# Altium PCB f2.PcbDoc (part 2 of 2)
Units mil, origin at the board's own origin, x right, y up, seen from the top; angles counter-clockwise.
Board outline 2023.27 x 874.02 mil, 6 copper layers (Top Layer, layer2, flex_top, flex_bottom, layer5, Bottom Layer), stack 57.4 mil thick; 105 components, 82 nets, 465 pads, 108 vias.
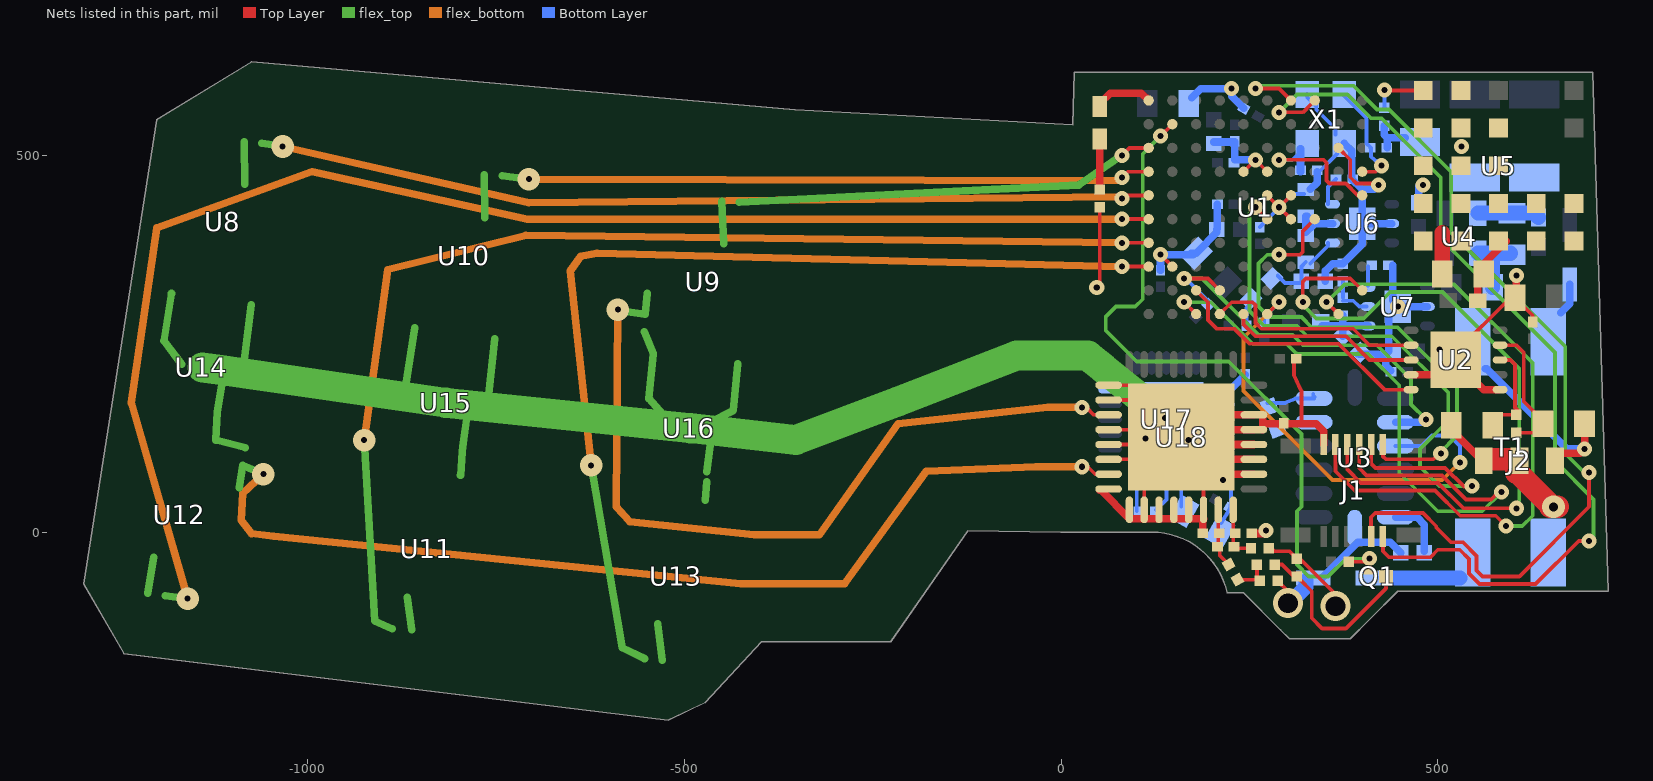
[diagram p6: the nets of this part, all layers, seen from the top]

## Via types
v1: diameter 20, hole 8, Top Layer to Bottom Layer, tented both sides, 79 vias
v2: diameter 30, hole 8, Top Layer to Bottom Layer, tented both sides, 21 vias
v3: diameter 20, hole 8, Top Layer to Bottom Layer, 3 vias
v4: diameter 40, hole 26, Top Layer to Bottom Layer, 2 vias
v5: diameter 30, hole 12, Top Layer to Bottom Layer, tented both sides, 1 vias
v6: diameter 20, hole 8, Top Layer to Bottom Layer, tented bottom, 1 vias
v7: diameter 24, hole 8, Top Layer to Bottom Layer, tented both sides, 1 vias

## Nets (pads, with @x,y where several pads share a name; then routed paths per layer and width w, separated by ;. In a path a pad name is that pad's centre, name@x,y a point inside that pad or via, vN(x,y) a via of type N, cw(c..) or ccw(c..) an arc to the next point about the centre after c; other vN are vias at no path point) (continued)
GND: C1.1 C2.1 C3.1 C4.1 C5.2 C6.1 C8.1 C10.1 C11.1 C14.1 C15.1 C16.1 C17.1 C18.2 C20.1 C21.1 C22.1 C23.1 C24.1 C25.1 C26.1 C27.1 C28.1 C29.1 C30.1 C31.1 C32.1 C33.1 C34.1 C35.1 C37.1 C38.1 C39.1 C40.1 C41.1 C42.1 C43.1 C44.1 C45.1 D3.1 J1.11 R1.1 R6.1 R7.2 R9.1 R10.2 R11.2 R12.2 R14.2 R16.2 R18.2 R21.1 R24.1 R25.1 U1.B3 U1.D5 U1.D6 U1.E4 U1.E5 U1.F4 U1.J8 U2.4 U2.6 U2.11 U3.7 U4.4 U5.C2 U5.D1 U5.D2 U5.D3 U5.D4 U5.D5 U5.E2 U5.E3 U5.E4 U5.E5 U6.2 U6.7 U7.2 U7.7 U14.4 U14.9 U15.4 U15.9 U16.4 U16.9 U17.4 U17.5 U17.10 U17.16 U17.17 U17.21 U18.1 U18.2 U18.4 U18.5 U18.6 U18.8 U18.9 U18.10 U18.11 U18.12 U18.13 U18.14 U18.18 U18.19 U18.20 U18.21 U18.22 U18.33 X1.2 X1.4 | length 5519.3
  Top Layer w5: v1@47.24,326.77 51.18,330.71 R1.1@51.18,431.1 ; U18.6@62.99,96.46 U18.33@98.43,96.46 ; U18.5@62.99,116.14 U18.33@104.33,116.14 ; U18.4@62.99,135.83 U18.33@102.36,135.83 ; U18.2@62.99,175.2 U18.33@102.36,175.2 ; U18.1@62.99,194.88 90.55,194.88 U18.33@94.49,190.94 ; U18.10@110.24,29.53 U18.33@110.24,68.9 ; v1(131.89,368.11) U1.J8@147.64,352.36 ; U18.14@188.98,17.72 U18.14@188.98,21.65 ; U18.14@188.98,29.53 U18.33@188.98,70.87 ; U1.F4@242.13,478.35 v1(257.87,494.09) U1.E4@273.62,478.35 ; U18.22@255.91,155.51 U18.22@267.72,155.51 ; U1.E5@273.62,446.85 v1(289.37,431.1) ; R21.1@287.4,-64.96 301.18,-78.74 v4@301.18,-96.46 ; U1.D6@305.12,415.35 v1(289.37,431.1) ; U1.D5@305.12,446.85 v1(289.37,431.1) ; C33.1@312.2,230.31 312.2,229.53 309.06,226.38 309.06,208.66 318.9,187.01 318.9,143.7 ; U1.B3@368.11,509.84 383.86,494.09 383.86,470.84 392.1,462.6 v1@419.29,462.6 ; U2.11@523.62,228.35 523.62,238.19 596.46,311.02 C45.1@598.43,311.02 ; C45.1@602.36,311.02 625.98,287.4 C5.2@625.98,278.74
  Top Layer w10: U18.8@51.18,55.12 53.15,55.12 90.55,17.72 U18.14@188.98,17.72 ; C35.1@187.8,-1.97 U18.14@187.8,16.93 ; U18.33@216.54,116.14 U18.20@255.91,116.14 ; U18.33@218.5,135.83 U18.21@255.91,135.83 ; U18.33@218.5,155.51 U18.22@255.91,155.51 ; U18.33@220.47,96.46 U18.19@255.91,96.46 ; U18.33@222.44,76.77 U18.18@255.91,76.77 ; C34.1@253.15,-1.97 267.72,-1.97 v1(271.65,1.97) ; U18.21@267.72,135.83 U18.22@267.72,155.51 ; 267.72,143.7 338.58,143.7 348.43,133.86 J1.11@348.43,116.14 ; U2.4@464.57,208.66 U2.11@511.81,208.66 ; U2.11@549.21,200.79 561.02,188.98 U2.6@580.71,188.98 ; C45.1@604.33,316.93 v1(604.33,340.55)
  Top Layer w20: C15.1@505.91,342.52 505.91,397.64
  flex_top w10: C26.1@-1180.99,316.6 -1190.94,253.94 U14.9@-1167.32,222.44 ; R16.2@-1122.16,122.37 -1120.08,159.45 -1120.02,159.79 U14.9@-1112.2,206.69 ; R16.2@-1122.05,122.05 R24.1@-1083,112.09 ; U14.9@-1115.28,214.94 -1084.65,228.35 R10.2@-1074.92,301.51 ; C27.1@-858.18,271.12 -870.08,194.88 U15.9@-842.52,177.17 ; R14.2@-797.33,75.33 -795.28,106.3 U15.4@-794.34,112.95 U15.9@-787.4,163.39 ; U15.9@-796,169.29 -790.46,171.41 -759.84,183.07 R12.2@-752.06,256.43 ; R25.1@-553.15,265.75 -541.34,236.22 -541.41,235.5 -547.24,177.17 U16.9@-519.68,145.67 ; R18.2@-472.51,42.07 U16.4@-470.47,66.93 ; U16.4@-470.49,79.89 U16.9@-464.57,125.98 ; U16.9@-466.54,145.67 -435.04,161.42 R11.2@-429.2,223.17
  flex_top w40: U14.9@-1139.76,218.5 -1115.28,214.94 -816.89,171.54 -814.96,171.26 -796,169.29 -494.07,138 -492.13,137.8 -352.36,122.05 -216.54,173.23 -59.05,234.25 35.43,234.25 57.09,216.54 v3(137.8,151.57)
  Bottom Layer w5: U17.10@64.96,188.98 U17.21@100.39,188.98 ; C30.1@100.39,27.56 U17.5@100.39,74.8 U17.21@100.39,116.14 ; U17.4@120.08,74.8 U17.21@120.08,116.14 ; v1@210.63,74.8 225.59,59.84 225.59,43.31 224.41,31.5 C29.1@212.6,11.81 ; C2.1@263.78,404.72 v1@289.37,430.32 ; v1(289.37,431.1) 307.09,448.82 R6.1@322.83,448.82 ; X1.4@326.77,580.71 326.77,576.77 338.58,564.96 338.58,561.02 364.17,535.43 X1.2@364.17,527.56 ; C11.1@339.76,478.35 342.52,478.35 X1.2@366.14,501.97 ; C25.1@392.35,234.25 C25.1@396.96,238.86
  Bottom Layer w10: C41.1@131.89,347.64 v1(131.89,368.11) C32.1@175.2,368.11 ; C32.1@173.03,369.88 C32.1@179.33,369.88 ; U17.21@173.23,169.29 U17.17@214.57,169.29 ; U17.21@173.23,188.98 U17.16@214.57,188.98 ; C43.1@173.23,576.77 185.04,588.58 v1(226.38,588.58) 226.38,578.64 C40.1@242.42,562.6 ; C32.1@181.1,372.05 206.69,397.64 C4.1@206.69,401.57 ; C3.1@202.76,517.72 230.32,517.72 230.32,494.09 v1(257.87,494.09) ; C4.1@207.48,402.36 C39.1@207.48,435.04 ; U17.17@224.41,169.29 224.41,188.98 C31.1@244.09,208.66 ; R6.1@330.71,454.72 339.76,463.78 C11.1@339.76,478.35 ; D3.1@346.46,-61.02 393.7,-13.78 437.01,-13.78 C6.1@450.79,-27.56 ; C22.1@350.39,332.68 350.39,346.46 360.24,356.3 R9.1@374.02,356.3 399.61,381.89 U6.7@399.61,405.51 ; X1.2@375.98,515.75 385.83,505.91 385.83,468.5 399.61,454.72 ; C25.1@395.67,236.22 431.1,236.22 435.04,240.16 U7.7@435.04,283.46 ; U6.7@399.61,409.45 399.61,454.72 ; U6.7@409.45,409.45 U6.2@438.98,409.45 ; v1(421.26,460.63) 415.35,454.72 399.61,454.72 ; R7.2@429.13,539.37 429.13,527.56 433.07,523.62 ; C23.1@431.1,234.25 431.1,220.47 C8.1@437.8,213.78 ; C10.1@433.07,509.84 433.07,523.62 ; U7.7@440.16,307.87 C24.1@440.16,354.33 ; U7.7@448.82,299.21 U7.2@486.22,299.21 ; C18.2@456.69,523.62 433.07,523.62 ; C20.1@474.41,437.01 v1@474.41,458.66
  Bottom Layer w20: v4@301.18,-96.46 324.8,-72.83 D3.1@324.8,-64.96 ; U4.4@553.15,370.08 C14.1@596.46,370.08 ; C44.1@572.83,324.8 572.83,360.24
  other v1: 214.57,68.9 446.85,299.21 47.24,324.8 480.32,460.63 531.5,511.81
  other v3: 169.29,122.05 112.2,124.02
  other v4: 301.18,-94.49
  other v6: 501.97,242.13
I2C_SCL: R3.1 U1.G9 U3.2 | length 557.5
  Top Layer w5: v1(163.39,336.61) 194.88,336.61 U1.G9@210.63,320.87
  flex_top w5: v1(163.39,336.61) 187.01,336.61 261.81,261.81 307.09,261.81 320.87,248.03 419.29,248.03 464.57,202.76 464.57,169.29 v1(484.25,149.61)
  Bottom Layer w5: v1@165.35,336.61 194.88,307.09 194.88,302.14 R3.1@195.36,301.66
  Bottom Layer w10: U3.2@443.9,145.67 v1@482.28,145.67
I2C_SDA: R2.1 U1.E10 U3.3 | length 660.5
  Top Layer w5: U1.E10@273.62,289.37 v1(289.37,305.12)
  flex_bottom w5: v1(289.37,305.12) 242.13,257.87 242.13,187.01 360.24,68.9 505.91,68.9 v1(529.53,92.52)
  Bottom Layer w5: R2.1@269.69,277.56 269.69,285.43 v1(289.37,305.12) ; U3.3@443.9,114.17 478.35,114.17 492.13,127.95 515.75,127.95 529.53,114.17 v1(529.53,92.52)
INPUT_NEG: C13.1 J2.3 T1.1 | length 249.2
  Top Layer w10: J2.3@655.51,104.33 688.98,104.33 v1(694.88,110.24) C13.1@694.88,141.73
  Bottom Layer w10: T1.1@562.99,216.54 564.96,216.54 671.26,110.24 v1(694.88,110.24)
INPUT_POS: C12.1 J2.1 J2.2 T1.3 | length 202.7
  Top Layer w10: C12.1@523.62,141.73 523.62,129.92 559.06,94.49 J2.1@561.02,94.49 J2.1@566.93,94.49 ; J2.2@604.33,94.49 J2.2@608.27,94.49
  Top Layer w30: J2.1@566.93,96.46 604.33,96.46 604.33,94.49 J2.2@604.33,78.74 ; J2.2@606.3,78.74 v5@651.57,33.46 ; v5@649.61,33.46 v5@659.45,33.46
  other v5: 653.54,33.46
LED_0: R26.1 U1.K5 | length 1184.1
  Top Layer w5: v1@84.65,446.85 U1.K5@116.14,446.85
  flex_top w10: R26.1@-1061.14,516.07 v2(-1033.46,511.81)
  flex_bottom w10: v2(-1033.46,511.81) -706.69,437.01 v1@80.69,444.88 ; v1(80.71,442.91) v1@80.71,444.88
LED_1: R27.1 U1.K3 | length 560.3
  Top Layer w5: v1(80.71,500) 90.55,509.84 U1.K3@116.14,509.84
  flex_top w10: R27.1@-427.23,437.74 23.62,460.63 v1(80.71,500)
LED_2: R28.1 U1.K4 | length 865.8
  Top Layer w5: v1(80.71,470.47) 88.58,478.35 U1.K4@116.14,478.35
  flex_top w10: R28.1@-742.21,472.97 v2(-706.69,468.5)
  flex_bottom w10: v2(-706.69,468.5) v1@80.7,466.54 ; v1@80.71,466.54 v1(80.71,470.47)
LED_3: R13.1 U1.K7 | length 1510.4
  Top Layer w5: v1(80.71,383.86) U1.K7@116.14,383.86
  flex_top w10: v2(-925.2,122.05) -911.42,-118.11 R13.1@-887.71,-128.48
  flex_bottom w10: v2(-925.2,122.05) -893.7,348.43 -710.63,393.7 v1(80.71,383.86)
LED_4: R15.1 U1.K6 | length 1871.9
  Top Layer w5: v1(80.71,415.35) U1.K6@116.14,415.35
  flex_top w10: R15.1@-1189.09,-84.32 v2(-1159.45,-88.58)
  flex_bottom w10: v2(-1159.45,-88.58) -1234.25,171.26 -1200.79,403.54 -994.09,478.35 -708.66,415.35 v1(80.71,415.35)
LED_5: R17.1 U1.K8 | length 1316.5
  Top Layer w5: v1(80.71,352.36) U1.K8@116.14,352.36
  flex_top w10: v2(-624.02,88.58) -582.68,-153.54 R17.1@-553.08,-168.06
  flex_bottom w10: v2(-624.02,88.58) -651.57,346.46 -637.8,366.14 -616.14,370.08 v1(80.71,352.36)
NetC6_2: C6.2 U3.6 | length 77.9
  Bottom Layer w10: U3.6@443.9,19.69 472.44,19.69 482.28,9.84 C6.2@482.28,-25.59
NetC7_1: C7.1 U3.12 | length 44.3
  Bottom Layer w5: C7.1@291.34,145.67 U3.12@335.63,145.67
NetC7_2: C7.2 U3.13 | length 68
  Bottom Layer w5: C7.2@273.62,171.26 297.24,171.26 311.02,177.17 U3.13@335.63,177.17 ; U3.13@334.65,183.07 334.65,181.1 U3.13@336.61,179.13
NetC14_2: C14.2 L4.1 U4.3 | length 83.2
  Bottom Layer w20: U4.3@553.15,423.23 C14.2@598.43,423.23 627.95,423.23 L4.1@633.86,417.32
NetC15_2: C15.2 L3.1 U5.A4 U5.A5 U5.B4 U5.B5 U5.C3 U5.C4 U5.C5 | length 94.2
  Top Layer w10: L3.1@553.15,307.09 553.15,348.43 U5.C5@590.55,385.83
NetC21_2: C21.2 U6.6 | length 37.9
  Bottom Layer w5: U6.6@354.33,435.04 354.33,457.87 C21.2@364.96,468.5
NetC22_2: C22.2 L1.1 R5.2 U6.4 | length 102.9
  Bottom Layer w5: L1.1@287.4,340.55 297.24,330.71 318.9,330.71 318.9,352.36 R5.2@324.8,358.27 ; R5.2@330.71,356.3 354.33,379.92 U6.4@354.33,383.86
NetC24_2: C24.2 U7.6 | length 25.6
  Bottom Layer w5: U7.6@407.48,326.77 C24.2@407.48,352.36
NetC25_2: C25.2 L2.1 R8.2 U7.4 | length 88.6
  Bottom Layer w10: L2.1@346.46,273.62 C25.2@374.02,273.62 ; C25.2@374.02,259.84 C25.2@374.02,273.62 ; R8.2@374.02,287.4 C25.2@374.02,273.62 ; U7.4@407.48,273.62 C25.2@374.02,273.62
NetC29_2: C29.2 U17.2 | length 41.3
  Bottom Layer w5: C29.2@159.45,33.46 U17.2@159.45,74.8
NetC30_2: C30.2 U17.3 | length 51
  Bottom Layer w5: C30.2@125.98,29.53 139.76,43.31 U17.3@139.76,74.8
NetD1_2: D1.2 R1.2 | length 66.9
  Top Layer w10: R1.2@51.18,454.72 D1.2@51.18,521.65
NetD2_1: D2.1 T1.4 | length 42.3
  Bottom Layer w10: T1.4@663.39,291.34 675.2,303.15 D2.1@675.2,328.74
NetD3_2: D3.2 T1.2 | length 98.4
  Bottom Layer w20: D3.2@431.1,-61.02 T1.2@529.53,-61.02
NetL1_2: L1.2 R29.1 | length 34.8
  Bottom Layer w5: R29.1@246.06,273.62 246.06,297.24 L1.2@253.94,305.12
NetQ1_D: Q1.D R19.2 R20.2 | length 233.7
  Top Layer w5: R20.2@285.43,-43.31 293.31,-43.31 309.06,-59.06 R19.2@311.02,-59.06 ; R19.2@311.02,-55.12 R19.2@316.93,-55.12 ; R19.2@316.93,-62.99 332.68,-78.74 332.68,-114.17 346.46,-127.95 377.95,-127.95 431.1,-74.8 ; 431.1,-72.83 Q1.D@431.1,-61.02
NetR5_1: R5.1 R6.2 U6.5 | length 77.9
  Bottom Layer w10: R6.2@326.77,419.29 R6.2@325.79,418.31 ; 334.65,407.48 324.8,397.64 R6.2@324.8,417.32 ; U6.5@360.24,409.45 334.65,409.45 R6.2@325.79,418.31 ; R6.2@324.8,417.32 R6.2@324.8,419.29 R6.2@325.79,418.31 ; R6.2@324.8,417.32 R6.2@325.79,418.31
NetR7_1: R7.1 U5.E1 | length 75.4
  Top Layer w5: v1(429.13,586.61) 429.53,586.22 U5.E1@480.71,586.22
  Bottom Layer w5: R7.1@429.13,562.99 v1(429.13,586.61)
NetR8_1: R8.1 R9.2 U7.5 | length 56.4
  Bottom Layer w5: R8.1@374.02,307.09 387.8,307.09 395.67,299.21 U7.5@405.51,299.21 ; R8.1@374.02,311.02 R9.2@374.02,332.68
NetR13_2: R13.2 U11.K | length 43.7
  flex_top w10: U11.K@-868.11,-86.61 R13.2@-862.2,-129.92
NetR15_2: R15.2 U12.K | length 48.2
  flex_top w10: R15.2@-1212.48,-81.03 U12.K@-1204.72,-33.46
NetR17_2: R17.2 U13.K | length 48.8
  flex_top w10: U13.K@-535.43,-122.05 R17.2@-529.59,-170.53
NetR20_1: R20.1 R21.2 R33.1 | length 48.8
  Top Layer w5: R33.1@234.25,-63.38 R21.2@263.39,-63.38 ; R21.2@259.84,-62.99 R20.1@259.84,-43.31
NetR26_2: R26.2 U8.K | length 56.3
  flex_top w10: R26.2@-1084.65,517.72 U8.K@-1084.05,461.44
NetR27_2: R27.2 U9.K | length 56.4
  flex_top w10: R27.2@-450.79,438.98 U9.K@-447.79,382.69
NetR28_2: R28.2 U10.K | length 57.3
  flex_top w10: R28.2@-765.75,474.41 U10.K@-764.93,417.16
NRST: J1.3 U1.E6 | length 848.1
  Top Layer w5: v1(257.87,431.1) U1.E6@273.62,415.35 ; J1.3@411.42,116.14 411.42,91.02 417.32,85.12 509.73,85.12 534.63,60.22 v1@550.38,60.22
  flex_top w5: v1(257.87,431.1) 250,423.23 250,293.31 269.69,273.62 312.99,273.62 326.77,259.84 438.98,259.84 513.78,185.04 513.78,147.64 476.38,110.24 476.38,86.61 501.97,61.02 v1@551.18,61.02
  other v1: 545.28,61.02
RS485_A: C12.2 R4.1 U2.8 | length 116.3
  Top Layer w5: C12.2@576.77,155.51 606.3,155.51 606.3,161.42 602.36,165.35 602.36,222.44 596.46,228.35 U2.8@586.61,228.35
RS485_B: C13.2 R4.2 U2.9 | length 166.3
  Top Layer w5: U2.9@586.61,248.03 604.33,248.03 614.17,238.19 614.17,173.23 639.76,147.64 C13.2@639.76,143.7 ; R4.2@606.3,131.89 C13.2@635.83,131.89
RS485_DE: U1.F10 U2.3 | length 247.9
  Top Layer w5: U1.F10@242.13,287.4 242.13,275.59 257.87,259.84 377.95,259.84 409.45,228.35 U2.3@458.66,228.35
RS485_DI: U1.H9 U2.5 | length 347.9
  Top Layer w5: U1.H9@179.13,320.87 194.88,305.12 194.88,281.5 206.69,269.69 230.32,269.69 250,250 ; 250,249.84 368.27,249.84 429.13,188.98 U2.5@458.66,188.98
RS485_RO: U1.G10 U2.2 | length 292
  Top Layer w5: U1.G10@210.63,289.37 226.38,305.12 253.94,305.12 257.87,301.18 257.87,277.56 265.59,269.84 387.64,269.84 409.45,248.03 U2.2@458.66,248.03
STATUS_LED: D1.1 U1.K1 | length 78.7
  Top Layer w10: D1.1@51.18,564.96 51.18,568.9 64.96,582.68 106.3,582.68 U1.K1@116.14,572.83
STRAIN_BRIDGE_LEAD: R19.1 R32.2 | length 113.9
  Top Layer w5: R32.2@275.59,-21.65 279.53,-21.65 283.46,-25.59 303.15,-25.59 R19.1@311.02,-33.46 ; R19.1@312.99,-35.43 316.93,-35.43 v4@366.14,-84.65
  other v4: 364.17,-98.43
STRAIN_BRIDGE_NEG: C19.2 C35.2 R33.2 U18.15 | length 77.3
  Top Layer w5: C19.2@208.66,-19.69 U18.15@208.66,29.53 ; C19.2@210.63,-19.69 210.63,-31.11 R33.2@222.44,-42.92
STRAIN_BRIDGE_POS: C19.1 C34.2 R32.1 U18.16 | length 61.8
  Top Layer w5: U18.16@228.35,17.72 228.35,-19.69 230.32,-21.65 R32.1@251.97,-21.65
STRAIN_BRIDGE_POWER: Q1.G R31.1 U1.J2 | length 974
  Top Layer w5: v1(131.89,525.59) U1.J2@147.64,541.34 ; R31.1@381.89,-39.37 v1@409.45,-39.37 ; Q1.G@409.45,-51.18 v1@409.45,-39.37 ; v1(409.45,-35.43) v1@409.45,-39.37
  flex_top w5: v1(131.89,525.59) 108.27,501.97 108.27,309.06 98.43,299.21 72.83,299.21 59.06,285.43 59.06,267.72 100.39,226.38 222.44,226.38 318.9,129.92 318.9,33.46 312.99,27.56 312.99,-43.31 328.74,-59.06 354.33,-59.06 377.95,-35.43 v1(409.45,-35.43)
TCLK: J1.1 U1.C6 | length 674.1
  Top Layer w5: v1(289.37,368.11) 316.93,368.11 320.87,372.05 320.87,399.61 U1.C6@336.61,415.35 ; J1.1@427.17,116.14 427.17,100.39 431.1,96.46 494.09,96.46 v1@501.97,104.33
  flex_top w5: v1(289.37,368.11) 273.62,368.11 261.81,356.3 261.81,299.21 275.59,285.43 318.9,285.43 332.68,271.65 446.85,271.65 525.59,192.91 525.59,127.95 v1@501.97,104.33
  other v1: 503.94,104.33
TDI: J1.5 U1.H10 | length 874.7
  Top Layer w5: v1(163.39,305.12) U1.H10@179.13,289.37 ; J1.5@395.67,116.14 395.67,84.96 405.51,75.12 505.59,75.12 537.4,43.31 570.87,43.31 v1@580.71,53.15
  flex_top w5: v1(163.39,305.12) 198.82,305.12 253.94,250 299.21,250 309.21,240 312.99,236.22 407.48,236.22 448.82,194.88 448.82,78.74 500,27.56 559.06,27.56 v1(584.65,53.15)
TDO: J1.9 U1.B10 | length 885.2
  Top Layer w5: v1(352.13,305.12) 352.36,305.12 U1.B10@368.11,289.37 ; J1.9@364.17,116.14 364.17,80.71 389.76,55.12 496.22,55.12 529.84,21.5 576.93,21.5 v1(590.55,7.87)
  flex_top w5: v1(352.13,305.12) v1@352.13,305.35 ; v1@352.36,305.12 375.98,328.74 521.65,328.74 625.98,224.41 625.98,21.65 612.2,7.87 v1(590.55,7.87)
TEMP_0: R23.2 R25.2 U18.3 | length 1063
  Top Layer w5: v1(27.56,165.35) 33.46,165.35 43.31,155.51 U18.3@62.99,155.51
  flex_top w10: v2@-580.71,293.31 R25.2@-552.53,289.31 ; R25.2@-551.91,289.31 -550.57,303.09 R23.2@-549.21,316.93
  flex_bottom w10: v2(-588.58,295.28) -590.55,33.46 -572.83,13.78 -407.48,-3.94 -320.87,-3.94 -216.54,143.7 -17.72,165.35 v1(27.56,165.35)
TEMP_1: R22.2 R24.2 U18.7 | length 1377.3
  Top Layer w5: v1(27.56,86.61) 35.43,86.61 45.28,76.77 U18.7@62.99,76.77
  flex_top w10: R22.2@-1090.88,58.94 -1086.61,88.58 -1086.38,88.48 v2(-1059.05,76.77)
  flex_bottom w10: v2(-1059.05,76.77) -1086.61,51.18 -1088.58,15.75 -1074.8,-1.97 -1045.28,-5.91 -425.2,-68.9 -287.4,-68.9 -179.13,80.71 -33.46,86.61 v1(27.56,86.61)
TMS: J1.7 U1.A9 | length 928.1
  Top Layer w5: v1(320.87,305.12) 320.87,332.68 324.8,336.61 383.86,336.61 U1.A9@399.61,320.87 ; J1.7@379.92,116.14 379.92,82.83 397.64,65.12 500.36,65.12 533.98,31.5 596.46,31.5 v1@597.44,32.48
  flex_top w5: v1(320.87,305.12) 320.87,301.18 338.58,283.46 401.57,283.46 436.85,318.74 506.06,318.74 608.27,216.54 608.27,39.37 v1@602.36,33.46
  other v1: 604.33,31.5
URXD1: J1.2 U1.C1 | length 1247
  Top Layer w5: v1(289.37,557.09) 320.87,557.09 U1.C1@336.61,572.83 ; J1.2@427.17,-5.91 427.17,-25.59 435.04,-33.46 490.16,-33.46 500,-23.62 529.17,-23.62 541.34,-35.8 541.34,-55.12 555.28,-69.06 629.76,-69.06 687.01,-11.81 v1(700.79,-11.81)
  flex_top w5: v1(289.37,557.09) 312.99,580.71 379.92,580.71 411.42,549.21 425.2,549.21 503.94,470.47 503.94,389.76 655.51,238.19 655.51,94.49 706.69,43.31 706.69,-5.91 v1(700.79,-11.81)
UTXD1: J1.4 U1.D1 | length 1287.7
  Top Layer w5: v1(257.87,588.58) 289.37,588.58 U1.D1@305.12,572.83 ; J1.4@411.42,-5.91 411.42,19.69 416.85,25.12 480.42,25.12 498.03,7.51 498.03,5.91 517.56,-13.62 533.31,-13.62 551.36,-31.68 551.36,-51 559.42,-59.06 608.27,-59.06 700.79,33.46 v1(700.79,78.74)
  flex_top w5: v1@257.87,592.52 387.8,592.52 419.29,561.02 435.04,561.02 517.72,478.35 517.72,397.64 669.29,246.06 669.29,104.33 694.88,78.74 v1(700.79,78.74)
XIN: C10.2 U1.A4 X1.1 | length 141.9
  Top Layer w5: U1.A4@399.61,478.35 417.32,478.35 v1(425.2,486.22)
  Bottom Layer w5: X1.1@375.98,578.74 405.51,549.21 405.51,515.75 410.24,511.02 C10.2@410.24,509.84 ; C10.2@411.42,509.84 411.42,498.03 v1(425.2,486.22)
XOUT: C11.2 U1.A5 X1.3 | length 205.6
  Top Layer w5: v1(289.37,494.09) 348.43,494.09 352.36,490.16 352.36,466.54 356.3,462.6 377.95,462.6 393.7,446.85 U1.A5@399.61,446.85
  Bottom Layer w5: v1(289.37,494.09) 307.09,494.09 X1.3@316.93,503.94
  Bottom Layer w10: C11.2@317.72,478.35 X1.3@317.72,508.66
pads on no net: J1.8 J1.MNT U1.A1 U1.A2 U1.A6 U1.A7 U1.A8 U1.A10 U1.B1 U1.B4 U1.B5 U1.B6 U1.B7 U1.B8 U1.B9 U1.C3 U1.C4 U1.C7 U1.C8 U1.C9 U1.C10 U1.D2 U1.D3 U1.D4 U1.D8 U1.D9 U1.D10 U1.E1 U1.E2 U1.E7 U1.E8 U1.E9 U1.F1 U1.F2 U1.F6 U1.F7 U1.F8 U1.F9 U1.G1 U1.G2 U1.G3 U1.G6 U1.G8 U1.H1 U1.H2 U1.H3 U1.H6 U1.H7 U1.H8 U1.J1 U1.J3 U1.J4 U1.J5 U1.J6 U1.J7 U1.K2 U2.7 U3.4 U3.5 U3.8 U3.9 U3.10 U3.11 U18.25 U18.26 U18.29 U18.30

## Polygon pours and split planes (outlines as drawn)
4V7_ANALOG on layer5 "layer5__4v7" (solid, remove dead copper, pour order 4): 19.69,307.09 551.18,307.09 551.18,-66.93 438.98,-66.93 403.54,-102.36 316.93,-102.36 281.5,-66.93 230.32,-66.93 218.5,-33.46 188.98,-5.91 155.51,9.84 127.95,13.78 7.87,13.78
3V3 on layer5 "layer5__3v3" (solid, pour order 5): 712.6,-66.93 572.83,-66.93 572.83,330.71 19.69,330.71 29.53,600.39 696.85,600.39
GND on layer2 "layer2__gnd" (solid, pour order 6): 712.6,-66.93 442.91,-66.93 403.54,-106.3 316.93,-106.3 279.53,-68.9 232.28,-68.9 220.47,-35.43 190.95,-9.84 145.67,11.81 13.78,11.81 29.53,600.39 694.88,600.39

## Other copper
Top Layer:
  region net GND: 594.49,549.21 566.93,549.21 545.28,570.87 545.28,598.43 515.75,598.43 515.75,570.87 494.09,549.21 468.5,549.21 468.5,374.02 545.28,374.02 545.28,500 566.93,521.65 594.49,521.65
  region net 24V: 696.85,521.65 627.95,521.65 627.95,541.34 596.46,572.83 566.93,572.83 566.93,598.43 696.85,598.43
  region net NetC15_2: 696.85,372.05 566.93,372.05 566.93,500 696.85,500
Bottom Layer:
  region net 5V: 468.5,346.46 468.5,364.17 454.72,377.95 433.07,377.95 433.07,389.76 452.76,389.76 462.6,399.61 462.6,411.42 450.79,423.23 450.79,429.13 435.04,429.13 435.04,440.94 450.79,440.94 456.69,435.04 456.69,425.2 466.54,415.35 492.13,415.35 498.03,421.26 521.65,421.26 521.65,318.9 482.28,318.9 482.28,338.58 476.38,344.49
  region net INPUT_POS: 669.29,11.81 669.29,47.24 624.02,47.24 622.05,45.28 622.05,11.81
  region net GND: 661.42,488.19 572.83,488.19 523.62,537.4 468.5,537.4 468.5,452.76 661.42,452.76
  region net 24V: 450.79,598.43 452.76,596.46 696.85,596.46 696.85,521.65 620.08,521.65 580.71,561.02 450.79,561.02
  region net GND: 616.14,360.24 616.14,324.8 578.74,324.8 578.74,360.24

## Silkscreen, mask and mechanical layers (free items; w line width, h text height)
Top Overlay:
  lines w5: 23.62,531.5 37.4,531.5 ; 25.59,259.84 53.15,232.28 ; 444.88,301.18 462.6,283.46 ; 655.51,610.24 655.51,561.02 702.76,561.02 ; 23.62,547.24 37.4,547.24 29.53,531.5 23.62,547.24
  lines w10: -1240.16,147.64 -1210.63,165.35 ; -915.35,96.46 -885.83,118.11 ; -588.58,59.06 -561.02,82.68
  text "SNL-4-0008 REV.A" at -275.59,-27.56 h30 r90
Bottom Overlay:
  lines w3: 470.47,340.55 470.47,311.02 500,311.02 ; 500,257.87 500,311.02 ; 500,340.55 500,311.02
  lines w5: 299.21,-70.87 299.21,-49.21 ; 299.21,-61.02 279.53,-70.87 279.53,-49.21 299.21,-59.06 ; 352.36,612.2 352.36,555.12 405.51,555.12 ; 492.13,395.67 531.5,395.67 531.5,346.46 ; 679.13,470.47 702.76,470.47 ; 679.13,448.82 702.76,448.82 690.95,470.47 679.13,448.82
  lines w10: 226.38,62.99 244.09,45.28 ; 440.95,450.79 464.57,474.41 ; 456.69,204.72 476.38,224.41
  text "SNL-5-0008" at 66.93,533.46 h25 r90
  text "REV. A" at 104.33,517.72 h25 r90
Mechanical 1:
  lines w5: -417.32,-165.35 -352.36,561.02
Mechanical 2:
  lines w5: 226.38,-2226.38 -600.39,-2124.02 -730.31,-2938.98 153.54,-3049.21 439.36,-3069.33 456.69,-2783.46 570.87,-2787.4 1303.15,-2787.4 1285.43,-2177.17 588.58,-2177.17 586.61,-2246.06 586.05,-2245.54
Mechanical 4:
  lines w5: -733.24,-2940.66 -606.8,-2141.61 225.56,-2226.7 584.22,-2246.8 586.61,-2177.17 1284.4,-2177.1 1304.85,-2867.5 887.72,-2866.05 751.33,-2787.34 568.17,-2787.34 455.02,-2785.79 265.75,-3057.09 151.24,-3050.41 -733.24,-2940.51
outline:
  the board outline again, w5
Mechanical 15:
  lines w5: -352.36,561.02 7.87,541.34 ; -10.57,0.06 5.48,540.6 ; 655.18,396.5 655.2,396.65 ; 726.11,-80.1 726.11,-78.65
border:
  lines w5: -2471.2,-1603.73 -2271.2,-1603.73 ; -2471.2,276.27 -2271.2,276.27 ; -95.2,-5351.73 -95.2,-5151.73 ; -95.2,1948.27 -95.2,2148.27 ; 922.64,-5150.79 922.64,-3950.79 2322.64,-3950.79 ; 2276.8,-5351.73 2276.8,-5151.73 ; 2276.8,1948.27 2276.8,2148.27 ; 2322.64,-5150.79 2322.64,-3950.79 ; 2322.64,-4850.79 6822.64,-4850.79 ; 2322.64,-4550.79 6822.64,-4550.79 ; 2322.64,-4250.79 3822.64,-4250.79 ; 3822.64,-5150.79 3822.64,-4550.79 3822.64,-3950.79 ; 4653.8,-5351.73 4653.8,-5151.73 ; 4653.8,1948.27 4653.8,2148.27 ; 5922.64,-5150.79 5922.64,-4550.79 ; 6822.64,-3950.79 3822.64,-3950.79 ; 6828.8,-3475.73 7028.8,-3475.73 ; 6828.8,-1603.73 7028.8,-1603.73 ; 6828.8,276.27 7028.8,276.27 ; 2322.64,-3950.79 3822.64,-3950.79 ; -2471.2,-5351.73 7028.8,-5351.73 7028.8,2148.27 -2471.2,2148.27 -2471.2,-5351.73 ; -2271.2,-5151.73 -2271.2,1948.27 6828.8,1948.27 6828.8,-5151.73 -2271.2,-5151.73
  text "1" at -1298.86,2013.27 h70
  text "2" at 1059.15,2013.27 h70
  text "3" at 3435.8,2013.27 h70
  text "4" at 5811.15,2013.27 h70
  text "A" at -2396.2,1123.27 h70
  text "A" at 6898.8,1123.27 h70
  text "B" at -2396.2,-752.73 h70
  text "B" at 6898.8,-752.73 h70
  text "C" at -2396.2,-2628.73 h70
  text "C" at 6898.8,-2628.73 h70
  text "ENGINEER:" at 2372.64,-4050.79 h45
  text "TITLE:" at 3872.64,-4050.79 h45
  text "M. Quigley" at 2423.23,-4204.72 h100
  text "F2:  Distal Phalange" at 3919.29,-4222.44 h100
  text "PCB DESIGNER:" at 2372.64,-4345.79 h45
  text "M. Quigley" at 2429.13,-4482.28 h100
  text "Open Source" at 1224.41,-4488.19 h90
  text "D" at -2396.2,-4500.73 h70
  text "D" at 6898.8,-4500.73 h70
  text "DATE:" at 2372.64,-4650.79 h45
  text "PART NO.:" at 3872.64,-4650.79 h45
  text "REV:" at 5972.64,-4650.79 h45
  text "Robotics Foundation" at 1015.75,-4655.51 h90
  text ".PRINT_DATE" at 2422.64,-4770.79 h70
  text "A" at 6015.75,-4801.18 h100
  text "FILE NAME:" at 2372.64,-4950.79 h45
  text "DWG NO:" at 3872.64,-4950.79 h45
  text "SCALE:" at 5972.64,-4950.79 h45
  text ".PCB_FILE_NAME_NO_PATH" at 2422.64,-5070.79 h70
  text "none" at 6021.65,-5090.55 h100
  text "1" at -1298.86,-5286.73 h70
  text "2" at 1059.15,-5286.73 h70
  text "3" at 3435.8,-5286.73 h70
  text "4" at 5811.15,-5286.73 h70
Drill Drawing:
  text ".legend" at 1992.13,-3444.88 h60
fabrication:
  lines w10: 19.69,665.35 31.5,1070.87 ; 1642.32,1650.59 3592.32,1650.59
  lines w11: -1914.41,-3669.2 14.8,-3669.2 ; -1914.41,-3477.8 14.8,-3477.8 ; -1974.41,-4869.1 ccw(c-1912.41,-4869.1) -1912.41,-4931.1 12.8,-4931.1 ccw(c12.8,-4869.1) 74.8,-4869.1 74.8,-3317.91 ccw(c12.8,-3317.91) 12.8,-3255.91 -1912.41,-3255.91 ccw(c-1912.41,-3317.91) -1974.41,-3317.91 -1974.41,-4869.1
  text "NOTES: (UNLESS OTHERWISE SPECIFIED)" at 1667.32,1700.59 h70
  text "1.  ALL DIMENSIONS ARE IN MILLIMETERS UNLESS OTHERWISE NOTED." at 1817.32,1450.59 h70
  text "2.  FABRICATE PCB IN ACCORDANCE WITH LATEST IPC-6011 AND IPC-6013, CLASS 2." at 1817.32,1275.59 h70
  text "3.  MATERIALS:" at 1817.32,1100.59 h70
  text "LAMINATE MATERIAL MUST BE ABLE TO WITHSTAND A LEAD FREE PROFILE." at 2017.32,975.59 h70
  text "6 LAYER" at 102.36,913.39 h60
  text "2 LAYER" at -450.79,909.45 h60
  text "USE HIGH TEMP FR-4 MATERIAL OR EQUIVALENT FOR THE RIGID PORTION." at 2017.32,850.59 h70
  text "RIGID -->" at 102.36,822.83 h60
  text "<--  FLEX" at -570.87,820.87 h60
  text "MUST MEET UL 94V-0 FLAMMABILITY RATING." at 2017.32,725.59 h70
  text "COPPER FOIL TO BE IN ACCORDANCE WITH IPC-MF-150, OUTER LAYER 1.0 OZ FINISHED." at 2017.32,600.59 h70
  text "OVERALL THICKNESS TO BE .050\" +/- .005 ON 6-LAYER RIGID PORTION." at 2017.32,475.59 h70
  text "AND .008\" +/- .002\" ON 2-LAYER FLEX PORTION." at 2011.81,334.65 h70
  text "4.  HOLE SIZES IN DRILL CHART ARE FINISHED DIAMETERS, AND IN INCHES." at 1817.32,145.08 h70
  text "LAYER TO LAYER REGISTRATION SHALL BE WITHIN 0.003" at 2017.32,20.08 h70
  text "ALL HOLES SHALL BE LOCATED WITHIN 0.003 RADIUS OF TRUE POSITION (RTP)." at 2017.32,-104.92 h70
  text "PLATED-THROUGH HOLES SHALL HAVE A TOLERANCE OF: +0.003/-0.003 FOR HOLE SIZES." at 2017.32,-229.92 h70
  text "5.  ALL PLATED-THROUGH HOLES AND CONDUCTIVE SURFACES SHALL BE PLATED WITH" at 1817.32,-404.92 h70
  text "A MINIMUM THICKNESS OF 0.001 COPPER." at 2017.32,-529.92 h70
  text "6.  FINISH:" at 1817.32,-704.92 h70
  text "SURFACE FINISH TO BE ELECTROLESS NICKEL/IMMERSION GOLD PER IPC-4552." at 2017.32,-829.92 h70
  text "NICKEL THICKNESS 120-240 MICROINCHES, GOLD THICKNESS 2.0-8.0 MICROINCHES." at 2017.32,-954.92 h70
  text "7.  SOLDER MASK:" at 1817.32,-1129.92 h70
  text "GREEN LIQUID PHOTOIMAGEABLE (LPI) SOLDERMASK SHALL BE APPLIED TO RIGID PORTION PER" at 2007.48,-1264.76 h70
  text "LATEST PC-SM-840, CLASS H, OVER BARE COPPER (SMOBC) TO BOTH SIDES OF THE BOARD." at 2007.48,-1389.76 h70
  text "FLEX PORTION TO BE COVERED BY FLEXIBLE COVER COAT OF ANY COLOR." at 2007.87,-1513.78 h70
  text "8.  SILKSCREEN:" at 1803.54,-1694.68 h70
  text "SHALL BE APPLIED WITH WHITE NON-CONDUCTIVE PERMANENT EPOXY INK." at 2003.54,-1819.68 h70
  text "THERE SHALL BE NO SILKSCREEN ON ANY SOLDERABLE COMPONENT PAD." at 2003.54,-1944.68 h70
  text "9.  TOLERANCES:" at 1803.54,-2119.68 h70
  text "BOW AND TWIST OF THE BOARD SHALL NOT EXCEED 0.75%." at 2003.54,-2244.68 h70
  text "CONDUCTOR WIDTHS AND SPACING SHALL BE WITHIN +/-0.002 OF GERBER DATA." at 2003.54,-2369.68 h70
  text "REMOVE ALL BURRS AND BREAK SHARP EDGES 0.012 MAX." at 2003.54,-2494.68 h70
  text "FLEX PORTION OF PCB CONSISTS" at -2041.34,-2913.39 h100
  text "SOLELY OF MIDDLE TWO LAYERS" at -2037.4,-3076.77 h100
  text "Layer Stack Up Detail for: f2.PcbDoc" at -1914.41,-3402.96 h52
  text "Layer" at -1914.41,-3549.3 h44
  text "Gerber" at -1134.69,-3549.3 h44
  text "Copper" at -597.9,-3549.3 h44
  text "Name" at -1914.41,-3637.3 h44
  text "Document" at -1134.69,-3637.3 h44
  text "Thickness" at -597.9,-3637.3 h44
  text "Top Layer" at -1914.41,-3762.74 h62
  text "(.GTL)" at -1134.69,-3762.74 h62
  text "1.4mil" at -597.9,-3762.74 h62
  text "layer 2" at -1914.41,-3938.8 h62
  text "(.G1)" at -1134.69,-3938.8 h62
  text "1.4mil" at -597.9,-3938.8 h62
  text "flex top" at -1914.41,-4114.87 h62
  text "(.G2)" at -1134.69,-4114.87 h62
  text "0.7mil" at -597.9,-4114.87 h62
  text "flex bottom" at -1914.41,-4290.94 h62
  text "(.G3)" at -1134.69,-4290.94 h62
  text "0.7mil" at -597.9,-4290.94 h62
  text "Fabrication Drawing" at 3919.29,-4411.42 h100
  text "layer 5" at -1914.41,-4467 h62
  text "(.G4)" at -1134.69,-4467 h62
  text "1.4mil" at -597.9,-4467 h62
  text "Bottom Layer" at -1914.41,-4643.07 h62
  text "(.GBL)" at -1134.69,-4643.07 h62
  text "1.4mil" at -597.9,-4643.07 h62
  text "SNL-5-0008" at 3903.54,-4799.21 h100
  text "SNL-5-0008-FAB" at 3911.42,-5082.68 h100
assembly:
  lines w10: 1642.32,1642.72 3592.32,1642.72
  text "NOTES: (UNLESS OTHERWISE SPECIFIED)" at 1667.32,1692.72 h70
  text "1.  ASSEMBLE BOARD PER IPC-A-610, CLASS 2 MINIMUM USING A LEAD-FREE (ROHS) PROCESS" at 1817.32,1442.72 h70
  text "2.  INDIVIDUALLY PLACE PCA IN ANTI-STATIC BAG PER EIA-525. PROTECT IN SHIPPING" at 1817.32,1267.72 h70
  text "CONTAINER TO PREVENT DAMAGE UNDER NORMAL TRANSPORT AND HANDLING." at 2009.45,1148.82 h70
  text "3.  MATERIAL REQUIREMENTS ARE SPECIFIED ON A SEPARATE BOM. ALTERNATE" at 1821.26,964.76 h70
  text "MATERIAL SHALL NOT BE USED UNLESS APPROVED IN WRITING." at 2021.26,839.76 h70
  text "4.  ORIENTATION OF THE PHOTOSENSORS ON THE FLEX PORTION IS CRITICAL. ENSURE THE" at 1823.23,702.95 h70
  text "MARKINGS ON THE BOTTOM OF THE SENSORS ALIGN WITH SILKSCREEN. TOP SIDE OF" at 2015.35,589.76 h70
  text "SENSOR HAS A LONGER LINE ON ONE EDGE WHICH MUST ALIGN WITH DOUBLE BARS" at 2009.45,467.72 h70
  text "ON SILKSCREEN." at 2009.84,354.33 h70
  text "Assembly Drawing" at 3919.29,-4419.29 h100
  text "SNL-4-0008" at 3903.54,-4799.21 h100
  text "SNL-4-0008-ASY" at 3911.42,-5090.55 h100

## Dimensions
-0.8,-0.23 to 726.03,-78.94 on border
761.81,-78.74 to 703.74,609.25 on border